# EAGLE board harp output expander front panel (EAGLE 9.5.1)
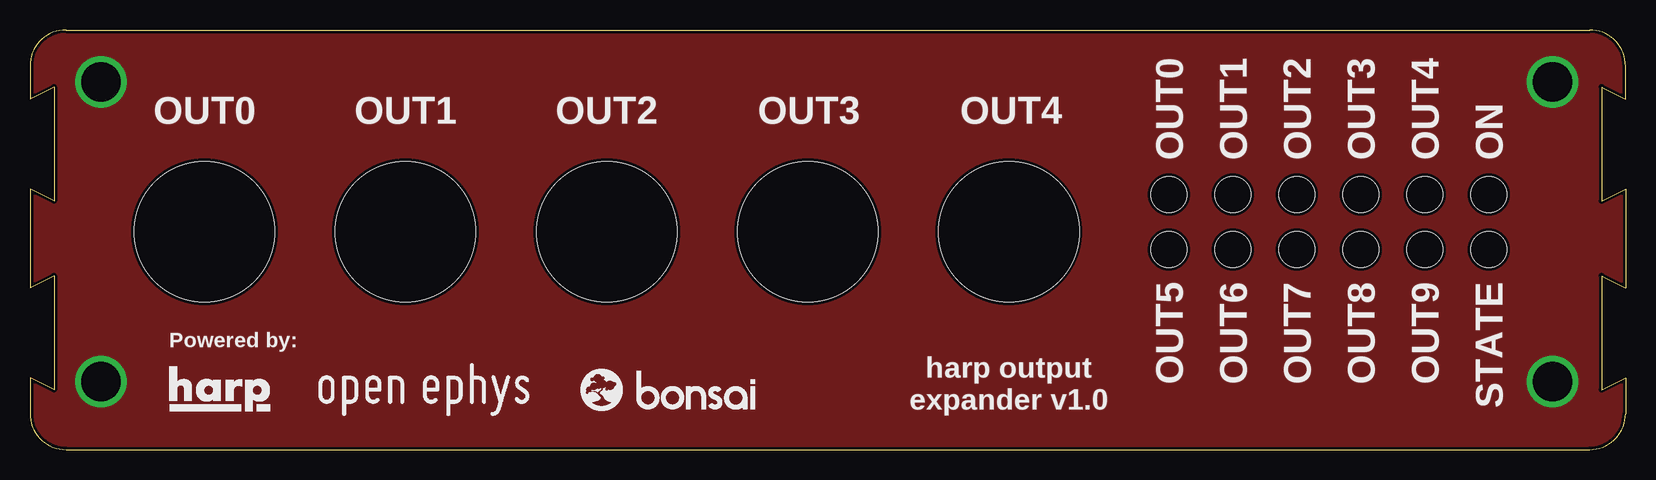
[diagram p0: board, top side]
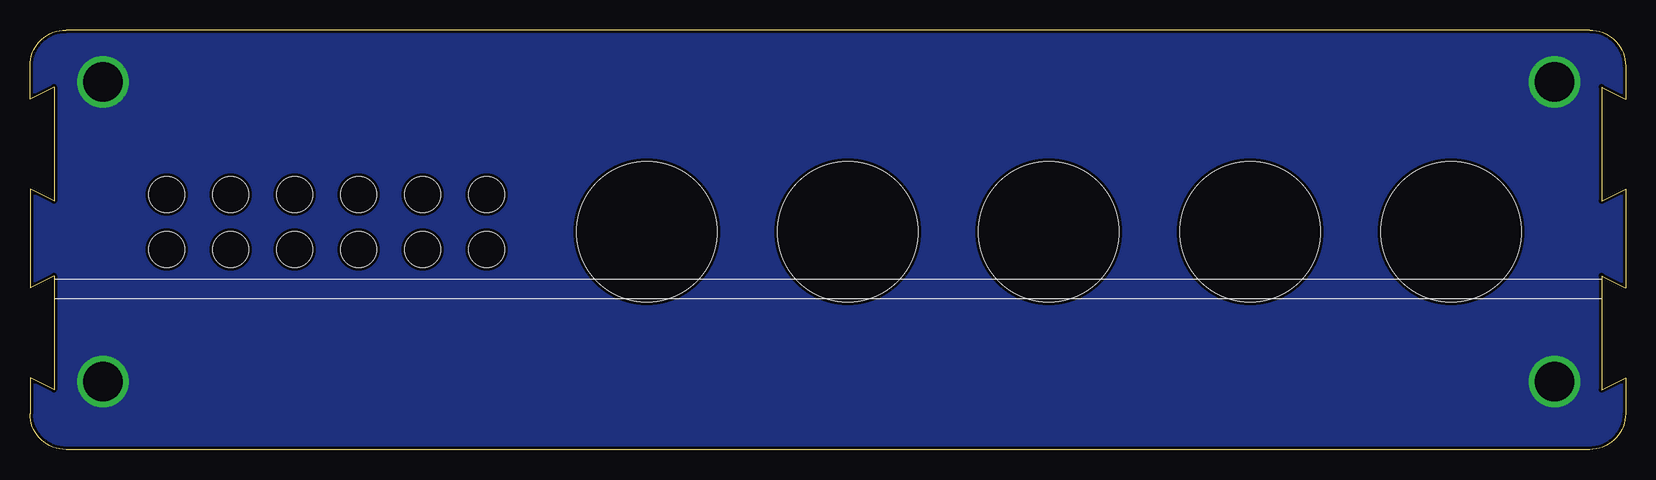
[diagram p1: board, bottom side, seen from below]

Size 133 x 35 mm. Coordinates in mm from the lower left corner, seen from the top.
Outline: 0,32 0,29.25 2,30.25 2,20.75 0,21.75 0,13.5 2,14.5 2,5 0,6 0,3 arc90 3,0 130,0 arc90 133,3 133,6 131,5 131,14.5 133,13.5 133,21.75 131,20.75 131,30.25 133,29.25 133,32 arc90 130,35 3,35 arc90 0,32
Copper layers (1*16): Top 0.035mm / dielectric 1.5mm / Bottom 0.035mm
Design rules "seeed-studio-2-layer": minimum track width 6mil, minimum drill 12mil, track to track 6mil, track to pad 6mil, pad to pad 6mil, via to via 6mil, smd to smd 0mil, copper to edge 10mil, drill to drill 10mil, minimum pad ring 10mil, minimum via ring 6mil, stop-mask expansion 2mil, vias tented up to drill 100mil, thermal gap 10mil
Holes 11.7 mm at 14.56,18.18 81.6,18.18 31.31,18.18 48.07,18.18 64.84,18.18
Holes 3 mm at 121.6,16.69 121.6,21.26 116.26,21.26 116.26,16.69 110.93,21.26 110.93,16.69 105.6,21.26 105.6,16.69 100.27,21.26 100.27,16.69 94.94,21.26 94.94,16.69

## Placement (x,y rotation side)
U$30  OPEN_EPHYS_LOGO  [OPEN_EPHYS_LOGO]  23.43,2.35 0 top

## Library data of the parts
U$30 = open-ephys

## Tracks (layer width: path | path; a pad name or v marks a point on that pad's centre or on a via)
GND  (via drill 3.3)
  other vias: 5.92,30.66 5.92,5.67 126.92,5.67 126.92,30.66
  pour Bottom: 0,0 0,35 133,35 133,0
  pour Top: 0,0 0,35 133,35 133,0

## Text on the board
tPlace: OUT0 | OUT1 | OUT2 | OUT3 | OUT4 | OUT0 | OUT1 | OUT2 | OUT3 | OUT4 | ON | OUT5 | OUT6 | OUT7 | OUT8 | OUT9 | STATE | Powered by: | harp output / expander v1.0
Measures: Board's / middle